# EAGLE board CT_schematic (EAGLE 7.6.0)

Size 100 x 80 mm. Coordinates in mm from the lower left corner, seen from the top.
Outline: 0,0 100,0 100,80 0,80 0,0
Copper layers (1*16): Top 0.035mm / dielectric 1.5mm / Bottom 0.035mm
Design rules "default": minimum track width 10mil, minimum drill 24mil, track to track 8mil, track to pad 8mil, pad to pad 8mil, via to via 8mil, smd to smd 8mil, copper to edge 40mil, drill to drill 8mil, minimum pad ring 10mil, minimum via ring 8mil, stop-mask expansion 4mil, vias tented up to drill 0mil, thermal gap 10mil

## Footprints (pad centres in the part's own frame; a part is rotated, then mirrored left to right if it is on the bottom)
C0603 = smd 0.8 x 0.8: 1 -0.762,0; 2 0.762,0
C0402 = smd 0.5 x 0.5: 1 -0.508,0; 2 0.508,0
C0805 = smd 1.2 x 1.3: 1 -1.016,0; 2 1.016,0
C1206 = smd 1.3 x 1.6: 1 -1.524,0; 2 1.524,0
C1210 = smd 1.2 x 2.5: 1 -1.524,0; 2 1.524,0
EXV-9H = smd 3.505 x 1.676: 1 -2.857,0; 2 2.857,0
PJ-037B_PACKAGE = drill 3.7 square: 1 12,0 | drill 3.2 square: 2 6,0
R0603 = smd 0.8 x 0.8: 1 -0.762,0; 2 0.762,0
WLCSP81 = smd 0.25 x 0.25: A1 -1.6,1.6; A2 -1.2,1.6; A3 -0.8,1.6; A4 -0.4,1.6; A5 0,1.6; A6 0.4,1.6; A7 0.8,1.6; A8 1.2,1.6; A9 1.6,1.6; B1 -1.6,1.2; B2 -1.2,1.2; B3 -0.8,1.2; B4 -0.4,1.2; B5 0,1.2; B6 0.4,1.2; B7 0.8,1.2; B8 1.2,1.2; B9 1.6,1.2; C1 -1.6,0.8; C2 -1.2,0.8; C3 -0.8,0.8; C4 -0.4,0.8; C5 0,0.8; C6 0.4,0.8; C7 0.8,0.8; C8 1.2,0.8; C9 1.6,0.8; D1 -1.6,0.4; D2 -1.2,0.4; D3 -0.8,0.4; D4 -0.4,0.4; D5 0,0.4; D6 0.4,0.4; D7 0.8,0.4; D8 1.2,0.4; D9 1.6,0.4; E1 -1.6,0; E2 -1.2,0; E3 -0.8,0; E4 -0.4,0; E5 0,0; E6 0.4,0; E7 0.8,0; E8 1.2,0; E9 1.6,0; F1 -1.6,-0.4; F2 -1.2,-0.4; F3 -0.8,-0.4; F4 -0.4,-0.4; F5 0,-0.4; F6 0.4,-0.4; F7 0.8,-0.4; F8 1.2,-0.4; F9 1.6,-0.4; G1 -1.6,-0.8; G2 -1.2,-0.8; G3 -0.8,-0.8; G4 -0.4,-0.8; G5 0,-0.8; G6 0.4,-0.8; G7 0.8,-0.8; G8 1.2,-0.8; G9 1.6,-0.8; H1 -1.6,-1.2; H2 -1.2,-1.2; H3 -0.8,-1.2; H4 -0.4,-1.2; H5 0,-1.2; H6 0.4,-1.2; H7 0.8,-1.2; H8 1.2,-1.2; H9 1.6,-1.2; J1 -1.6,-1.6; J2 -1.2,-1.6; J3 -0.8,-1.6; J4 -0.4,-1.6; J5 0,-1.6; J6 0.4,-1.6; J7 0.8,-1.6; J8 1.2,-1.6; J9 1.6,-1.6
TST-110-05-T-D-RA = drill 1 pad 1.7 square: 1 0,0 | drill 1 pad 1.7: 2 0,2.54; 3 2.54,0; 4 2.54,2.54; 5 5.08,0; 6 5.08,2.54; 7 7.62,0; 8 7.62,2.54; 9 10.16,0; 10 10.16,2.54; 11 12.7,0; 12 12.7,2.54; 13 15.24,0; 14 15.24,2.54; 15 17.78,0; 16 17.78,2.54; 17 20.32,0; 18 20.32,2.54; 19 22.86,0; 20 22.86,2.54
SOIC-8 = smd 1.6 x 0.6: 1 -2.7,1.905 | smd 1.55 x 0.6: 2 -2.7,0.635; 3 -2.7,-0.635; 4 -2.7,-1.905; 5 2.7,-1.905; 6 2.7,-0.635; 7 2.7,0.635; 8 2.7,1.905
182-009-MALE = drill 1.194 pad 1.524 octagon: 1 -5.537,10.923; 2 -2.769,10.923; 3 0,10.923; 4 2.769,10.923; 5 5.537,10.923; 6 -4.153,8.08; 7 -1.384,8.08; 8 1.384,8.08; 9 4.153,8.08 | hole 3.048: -12.446,9.501; 12.446,9.501
MOLEX_47219-2001 = smd 0.8 x 1.5: 1 3.2,-2.1; 2 2.1,-2.1; 3 1,-2.1; 4 -0.1,-2.1; 5 -1.2,-2.1; 6 -2.3,-2.1; 7 -3.4,-2.1; 8 -4.5,-2.1 | smd 1.5 x 2.05: G1 6.875,-4.7; G2 6.875,3.6; G3 -6.875,3.6; G4 -6.875,-4.7
QFN-32 = smd 0.6 x 0.3: 1 -2.3,1.75; 2 -2.3,1.25; 3 -2.3,0.75; 4 -2.3,0.25; 5 -2.3,-0.25; 6 -2.3,-0.75; 7 -2.3,-1.25; 8 -2.3,-1.75; 17 2.3,-1.75; 18 2.3,-1.25; 19 2.3,-0.75; 20 2.3,-0.25; 21 2.3,0.25; 22 2.3,0.75; 23 2.3,1.25; 24 2.3,1.75 | smd 0.3 x 0.6: 9 -1.75,-2.3; 10 -1.25,-2.3; 11 -0.75,-2.3; 12 -0.25,-2.3; 13 0.25,-2.3; 14 0.75,-2.3; 15 1.25,-2.3; 16 1.75,-2.3; 25 1.75,2.3; 26 1.25,2.3; 27 0.75,2.3; 28 0.25,2.3; 29 -0.25,2.3; 30 -0.75,2.3; 31 -1.25,2.3; 32 -1.75,2.3 | smd 3.2 x 3.2: EXP 0,0
SJ-43515TS-SMT-TR = smd 2.2 x 3: 1 0.6,-7.4; 4 3.4,-7.4 | smd 3 x 3: 2 12.8,-7.4; 5 17,-3 | smd 2 x 3: 3 5.3,0; 6 2.5,0 | drill 1.8: P$7 4.5,-3.69; P$8 11.54,-3.69
WM-64PC = drill 0.6 pad 1: 1 -1,0.95; 2 -1,-0.95
WFDN-8 = smd 0.48 x 0.7: 1 0,0; 2 1.27,0; 3 2.54,0; 4 3.81,0; 5 3.81,4.45; 6 2.54,4.45; 7 1.27,4.45; 8 0,4.45 | smd 4 x 3: 9 1.89,2.25
ASEK = smd 1.4 x 1: 1 -1.1,-0.8; 2 1.1,-0.8; 3 1.1,0.8; 4 -1.1,0.8
ASFL1 = smd 1.7 x 1.5: 1 -1.27,-1.1; 2 1.27,-1.1; 3 1.27,1.1; 4 -1.27,1.1
WSON-8 = smd 0.3 x 0.6: 1 -0.75,0; 2 0.05,0; 3 0.85,0; 4 1.65,0; 5 1.65,3.8; 6 0.85,3.8; 7 0.05,3.8; 8 -0.75,3.8 | smd 3 x 2.6: PAD 0.45,1.9
SON-6 = smd 0.55 x 0.3: 1 -0.355,0.5 | smd 0.52 x 0.3: 2 -0.37,0; 3 -0.37,-0.5; 4 0.37,-0.5; 5 0.37,0; 6 0.37,0.5
SW_4-1437565-2 = smd 1.4 x 2.1: 1 -2.23,4.55; 2 -2.23,-4.55; 3 2.23,4.55; 4 2.23,-4.55
LGM67K-G1J2-24-Z = smd 0.8 x 1.4: A -2,0; C 0,0
NC7SZ125M5X = smd 1.3 x 0.7: 1 -1.3,0.95; 2 -1.3,0; 3 -1.3,-0.95; 4 1.3,-0.95; 5 1.3,0.95

## Placement (x,y rotation side)
C1  1e-06  [C0603]  -33.02,92.71 0 top  (outside the outline)
C2  1e-07  [C0603]  -36.83,92.71 0 top  (outside the outline)
C3  1e-07  [C0603]  -40.64,92.71 0 top  (outside the outline)
C4  1e-07  [C0603]  -44.45,92.71 0 top  (outside the outline)
C5  1e-07  [C0603]  -48.26,92.71 0 top  (outside the outline)
C6  1e-07  [C0603]  -52.07,92.71 0 top  (outside the outline)
C7  4.7e-06  [C0603]  -29.21,92.71 0 top  (outside the outline)
C8  1e-07  [C0603]  -55.88,92.71 0 top  (outside the outline)
C9  1e-07  [C0603]  -59.69,92.71 0 top  (outside the outline)
C10  1e-07  [C0603]  -63.5,92.71 0 top  (outside the outline)
C11  1e-08  [C0603]  -67.31,92.71 0 top  (outside the outline)
C12  1e-06  [C0603]  -71.12,92.71 0 top  (outside the outline)
C13  1e-07  [C0402]  -80.01,97.79 0 top  (outside the outline)
C14  1e-08  [C0402]  -83.82,97.79 0 top  (outside the outline)
C15  1e-06  [C0603]  -74.93,92.71 0 top  (outside the outline)
C16  1e-06  [C0603]  -78.74,92.71 0 top  (outside the outline)
C17  1e-07  [C0402]  -87.63,97.79 0 top  (outside the outline)
C18  1e-05  [C0805]  -66.04,80.01 0 top  (outside the outline)
C19  1e-06  [C0603]  -82.55,92.71 0 top  (outside the outline)
C20  1e-06  [C0603]  -86.36,92.71 0 top  (outside the outline)
C21  1e-06  [C0603]  -90.17,92.71 0 top  (outside the outline)
C22  1e-06  [C0603]  -93.98,92.71 0 top  (outside the outline)
C23  1e-06  [C0603]  -15.24,97.79 0 top  (outside the outline)
C24  1e-06  [C0603]  -19.05,97.79 0 top  (outside the outline)
C25  1e-06  [C0603]  -22.86,97.79 0 top  (outside the outline)
C26  1e-07  [C0402]  -91.44,97.79 0 top  (outside the outline)
C27  1e-07  [C0402]  -95.25,97.79 0 top  (outside the outline)
C28  1e-07  [C0402]  -15.24,102.87 0 top  (outside the outline)
C29  1e-07  [C0402]  -19.05,102.87 0 top  (outside the outline)
C30  1e-06  [C0603]  -26.67,97.79 0 top  (outside the outline)
C31  1e-07  [C0402]  -22.86,102.87 0 top  (outside the outline)
C32  1e-08  [C0402]  -26.67,102.87 0 top  (outside the outline)
C33  1e-08  [C0402]  -30.48,102.87 0 top  (outside the outline)
C34  1e-08  [C0402]  -34.29,102.87 0 top  (outside the outline)
C35  1e-08  [C0402]  -38.1,102.87 0 top  (outside the outline)
C36  1e-05  [C1206]  -41.91,80.01 0 top  (outside the outline)
C37  1e-05  [C0805]  -71.12,80.01 0 top  (outside the outline)
C38  1e-08  [C0402]  -41.91,102.87 0 top  (outside the outline)
C39  1e-05  [C1206]  -48.26,80.01 0 top  (outside the outline)
C40  1e-05  [C1210]  -29.21,81.28 0 top  (outside the outline)
C41  1e-06  [C0603]  -30.48,97.79 0 top  (outside the outline)
C42  1e-05  [C1210]  -35.56,81.28 0 top  (outside the outline)
C43  1e-07  [C0402]  -45.72,102.87 0 top  (outside the outline)
C44  0.0001  [EXV-9H]  -74.93,73.66 0 top  (outside the outline)
C45  0.0001  [EXV-9H]  -86.36,73.66 0 top  (outside the outline)
C46  1e-08  [C0402]  -49.53,102.87 0 top  (outside the outline)
C47  1e-08  [C0402]  -53.34,102.87 0 top  (outside the outline)
J1  PJ-037B  [PJ-037B_PACKAGE]  -27.94,43.18 0 top  (outside the outline)
R2  1000.0  [R0603]  -34.29,97.79 0 top  (outside the outline)
R4  4700.0  [R0603]  -38.1,97.79 0 top  (outside the outline)
R5  2200.0  [R0603]  -41.91,97.79 0 top  (outside the outline)
R6  2200.0  [R0603]  -45.72,97.79 0 top  (outside the outline)
R7  10000.0  [R0603]  -76.2,87.63 0 top  (outside the outline)
R8  10000.0  [R0603]  -81.28,87.63 0 top  (outside the outline)
R9  10000.0  [R0603]  -86.36,87.63 0 top  (outside the outline)
R10  10000.0  [R0603]  -91.44,87.63 0 top  (outside the outline)
R11  10000.0  [R0603]  -15.24,92.71 0 top  (outside the outline)
R12  120.0  [R0603]  -49.53,97.79 0 top  (outside the outline)
R13  100000.0  [R0603]  -76.2,80.01 0 top  (outside the outline)
R14  100000.0  [R0603]  -81.28,80.01 0 top  (outside the outline)
R15  100000.0  [R0603]  -86.36,80.01 0 top  (outside the outline)
R16  100000.0  [R0603]  -91.44,80.01 0 top  (outside the outline)
R17  100000.0  [R0603]  -15.24,87.63 0 top  (outside the outline)
R18  100000.0  [R0603]  -20.32,87.63 0 top  (outside the outline)
R19  1270.0  [R0603]  -53.34,97.79 0 top  (outside the outline)
R20  1270.0  [R0603]  -57.15,97.79 0 top  (outside the outline)
R21  100000.0  [R0603]  -25.4,87.63 0 top  (outside the outline)
R22  100000.0  [R0603]  -30.48,87.63 0 top  (outside the outline)
R23  100000.0  [R0603]  -35.56,87.63 0 top  (outside the outline)
R24  100000.0  [R0603]  -40.64,87.63 0 top  (outside the outline)
R25  200.0  [R0603]  -60.96,97.79 0 top  (outside the outline)
R26  1000.0  [R0603]  -64.77,97.79 0 top  (outside the outline)
R27  100000.0  [R0603]  -45.72,87.63 0 top  (outside the outline)
R28  2231.0  [R0603]  -68.58,97.79 0 top  (outside the outline)
R29  1000.0  [R0603]  -72.39,97.79 0 top  (outside the outline)
R30  100000.0  [R0603]  -50.8,87.63 0 top  (outside the outline)
R31  300000.0  [R0603]  -55.88,87.63 0 top  (outside the outline)
R32  100000.0  [R0603]  -60.96,87.63 0 top  (outside the outline)
R33  10000.0  [R0603]  -20.32,92.71 0 top  (outside the outline)
R34  10000.0  [R0603]  -25.4,92.71 0 top  (outside the outline)
R35  9100.0  [R0603]  -76.2,97.79 0 top  (outside the outline)
R36  680000.0  [R0603]  -66.04,87.63 0 top  (outside the outline)
R37  120000.0  [R0603]  -71.12,87.63 0 top  (outside the outline)
U1  STM32L476MGY6  [WLCSP81]  -80.01,64.77 0 top  (outside the outline)
U2  TST-110-05-T-D-RA  [TST-110-05-T-D-RA]  -46.99,71.12 0 top  (outside the outline)
U3  24AA1025T-I/SN  [SOIC-8]  -22.86,54.61 0 top  (outside the outline)
U4  MCP2562-E/SN  [SOIC-8]  -36.83,54.61 0 top  (outside the outline)
U5  182-009-113R531  [182-009-MALE]  -36.83,6.35 0 top  (outside the outline)
U6  0472192001  [MOLEX_47219-2001]  -62.23,8.89 0 top  (outside the outline)
U7  SGTL5000XNAA3  [QFN-32]  -90.17,41.91 0 top  (outside the outline)
U8  SJ-43515TS-SMT-TR  [SJ-43515TS-SMT-TR]  -39.37,31.75 0 top  (outside the outline)
U9  SJ-43515TS-SMT-TR  [SJ-43515TS-SMT-TR]  -67.31,31.75 0 top  (outside the outline)
U10  SJ-43515TS-SMT-TR  [SJ-43515TS-SMT-TR]  -95.25,31.75 0 top  (outside the outline)
U11  WM-64PCT  [WM-64PC]  -76.2,41.91 0 top  (outside the outline)
U12  SST26VF032B-104I/MF  [WFDN-8]  -67.31,39.37 0 top  (outside the outline)
U13  ASEK-32.768KHz-ECST  [ASEK]  -66.04,73.66 0 top  (outside the outline)
U14  ASFL-24.57MHZ-NCS  [ASFL1]  -46.99,64.77 0 top  (outside the outline)
U15  ASFL1-25MHZ-NCS  [ASFL1]  -63.5,64.77 0 top  (outside the outline)
U16  LP3878SDX-ADJ/NOPB  [WSON-8]  -58.42,53.34 0 top  (outside the outline)
U17  LP3878SDX-ADJ/NOPB  [WSON-8]  -78.74,53.34 0 top  (outside the outline)
U18  LP2951ACSDX/NOPB  [WSON-8]  -29.21,62.23 0 top  (outside the outline)
U19  TPS3895ADRYR  [SON-6]  -55.88,101.6 0 top  (outside the outline)
U20  4-1437565-2  [SW_4-1437565-2]  -44.45,43.18 0 top  (outside the outline)
U21  Q65110A2395  [LGM67K-G1J2-24-Z]  -17.78,81.28 0 top  (outside the outline)
U22  nc7sz125m5x  [NC7SZ125M5X]  -53.34,80.01 0 top  (outside the outline)
U23  nc7sz125m5x  [NC7SZ125M5X]  -59.69,80.01 0 top  (outside the outline)

## Library data of the parts
C1-C47 J1 R2 R4-R37 U1-U23 = circuit_tree

## Nets
CLK_U1_C9: U1.C9 U13.3
CLK_U1_D9: U1.D9 U15.3
CLK_U7_21: U7.21 U14.3
GND: C1.2 C2.2 C3.2 C4.2 C5.2 C6.2 C7.2 C8.2 C9.2 C10.2 C11.2 C12.2 C13.2 C14.2 C15.2 C16.2 C17.2 C18.2 C26.2 C27.2 C28.2 C29.2 C30.2 C31.2 C32.2 C33.2 C34.2 C35.2 C36.2 C37.2 C38.2 C39.2 C40.2 C41.2 C42.2 C43.2 C44.2 C45.2 C46.2 C47.2 J1.2 R2.2 R7.2 R20.2 R26.2 R29.2 R32.2 R35.2 R37.2 U1.A8 U1.B1 U1.G9 U1.J2 U1.J9 U2.4 U2.6 U2.8 U2.10 U2.12 U2.14 U2.16 U2.18 U2.20 U3.4 U3.7 U4.2 U4.8 U5.5 U6.6 U6.G1 U6.G2 U6.G3 U6.G4 U7.1 U7.3 U7.7 U7.EXP U9.1 U10.1 U11.2 U12.4 U12.9 U13.2 U14.2 U15.2 U16.3 U16.PAD U17.3 U17.PAD U18.3 U18.4 U18.PAD U19.2 U21.C U22.2 U22.3 U23.1 U23.3
NET_U1_A5: R5.1 U1.A5 U3.6
NET_U1_A7: R6.1 U1.A7 U3.5
NET_U1_D7: R7.1 U1.D7
NET_U1_E9: R4.1 U1.E9 U23.4
NET_U1_J6: U21.A
NET_U1_J7: U20.3 U20.4
NET_U3_1: R10.1 U3.1
NET_U3_2: R11.1 U3.2
NET_U3_3: R9.1 U3.3
NET_U4_6: R12.2 U4.6
NET_U5_2: R12.2 U4.6 U5.2
NET_U5_3: R12.1 U4.7 U5.3
NET_U7_10: C29.1 U7.10
NET_U7_29: R19.1 U7.29
NET_U7_31: R20.1 U7.31
NET_U8_1: U7.4 U8.1
NET_U8_2: U7.2 U8.2
NET_U8_5: U7.6 U8.5
NET_U9_2: C20.1 U9.2
NET_U9_5: C19.1 U9.5
NET_U9_11: C20.2
NET_U9_12: C19.2
NET_U10_2: C22.1 C23.1 U10.2
NET_U10_5: C21.1 U10.5
NET_U10_13: C22.2 C23.2
NET_U10_14: C21.2
NET_U11_1: C24.1 C25.1 C30.1 U7.16 U11.1
NET_U11_15: C24.2 C25.2
NET_U16_1: C35.1 U16.1
NET_U16_6: R25.2 R26.1 U16.6
NET_U16_8: R24.1 U16.8
NET_U17_1: C38.1 U17.1
NET_U17_6: R28.2 R29.1 U17.6
NET_U17_8: R27.1 U17.8
NET_U18_5: R30.1 U18.5
NET_U18_7: R31.2 R32.1 U18.7
NET_U19_1: R34.1 R35.1 U19.1
NET_U19_3: R36.2 R37.1 U19.3
NET_U19_4: R33.1 U19.4 U22.4 U23.2
NET_U20_1: R2.1 U20.1 U20.2
PROC_CAN1_RX: U1.D1 U4.4
PROC_CAN1_TX: U1.C1 U4.1
PROC_QUADSPI_BK1_IO0: U1.J4 U12.5
PROC_QUADSPI_BK1_IO1: U1.J5 U12.2
PROC_QUADSPI_BK1_IO2: R22.1 U1.H4 U12.3
PROC_QUADSPI_BK1_IO3: R23.1 U1.H5 U12.7
PROC_QUADSPI_CLK: U1.H3 U12.6
PROC_QUADSPI_NCS: R21.1 U1.G3 U12.1
PROC_SAI1_FS_B: U1.B7 U7.23
PROC_SAI1_SCK_B: U1.F6 U7.24
PROC_SAI1_SD_B: U1.C7 U7.26
PROC_SDMMC1_CK: R14.1 U1.B3 U6.5
PROC_SDMMC1_CMD: R13.1 U1.A3 U6.3
PROC_SDMMC1_D0: R15.1 U1.F2 U6.7
PROC_SDMMC1_D1: R16.1 U1.E1 U6.8
PROC_SDMMC1_D2: R17.1 U1.D3 U6.1
PROC_SDMMC1_D3: R18.1 U1.C3 U6.2
PROC_SYS_JTCK_SWCLK: U1.B2 U2.9
PROC_SYS_JTDO_SWO: U1.A6 U2.13
PROC_SYS_JTMS_SWDIO: U1.C2 U2.7
RST_OUT_U2_SRESET_B: R8.1 U2.15 U22.1
VCC_S1_6V5: C36.1 C39.1 C41.1 C44.1 C45.1 J1.1 R24.2 R27.2 U16.4 U17.4 U18.8
VCC_TIER1_1V2: C26.1 C37.1 R25.1 U7.30 U16.5
VCC_TIER1_3V3: C1.1 C2.1 C3.1 C4.1 C5.1 C6.1 C7.1 C8.1 C9.1 C10.1 C11.1 C12.1 C13.1 C14.1 C16.1 C17.1 C18.1 C27.1 C28.1 C31.1 C32.1 C33.1 C34.1 C40.1 C43.1 C46.1 C47.1 R4.2 R5.2 R6.2 R8.2 R9.2 R10.2 R11.2 R13.2 R14.2 R15.2 R16.2 R17.2 R18.2 R19.2 R21.2 R22.2 R23.2 R28.1 R33.2 R34.2 R36.1 U1.A1 U1.A9 U1.B6 U1.B9 U1.E4 U1.G8 U1.H9 U1.J1 U1.J8 U2.1 U3.8 U4.5 U6.4 U7.5 U7.20 U12.8 U13.4 U14.4 U15.4 U17.5 U19.6 U22.5 U23.5
VCC_TIER1_5V0: C15.1 C42.1 R30.2 R31.1 U4.3 U18.1

## Tracks (layer width: path | path; a pad name or v marks a point on that pad's centre or on a via)
CLK_U1_C9  (1 unrouted)
CLK_U1_D9  (1 unrouted)
CLK_U7_21  (1 unrouted)
GND  (97 unrouted)
NET_U1_A5  (2 unrouted)
NET_U1_A7  (2 unrouted)
NET_U1_D7  (1 unrouted)
NET_U1_E9  (2 unrouted)
NET_U1_J7  (1 unrouted)
NET_U3_1  (1 unrouted)
NET_U3_2  (1 unrouted)
NET_U3_3  (1 unrouted)
NET_U4_6  (1 unrouted)
NET_U5_2  (2 unrouted)
NET_U5_3  (2 unrouted)
NET_U7_10  (1 unrouted)
NET_U7_29  (1 unrouted)
NET_U7_31  (1 unrouted)
NET_U8_1  (1 unrouted)
NET_U8_2  (1 unrouted)
NET_U8_5  (1 unrouted)
NET_U9_2  (1 unrouted)
NET_U9_5  (1 unrouted)
NET_U10_2  (2 unrouted)
NET_U10_5  (1 unrouted)
NET_U10_13  (1 unrouted)
NET_U11_1  (4 unrouted)
NET_U11_15  (1 unrouted)
NET_U16_1  (1 unrouted)
NET_U16_6  (2 unrouted)
NET_U16_8  (1 unrouted)
NET_U17_1  (1 unrouted)
NET_U17_6  (2 unrouted)
NET_U17_8  (1 unrouted)
NET_U18_5  (1 unrouted)
NET_U18_7  (2 unrouted)
NET_U19_1  (2 unrouted)
NET_U19_3  (2 unrouted)
NET_U19_4  (3 unrouted)
NET_U20_1  (2 unrouted)
PROC_CAN1_RX  (1 unrouted)
PROC_CAN1_TX  (1 unrouted)
PROC_QUADSPI_BK1_IO0  (1 unrouted)
PROC_QUADSPI_BK1_IO1  (1 unrouted)
PROC_QUADSPI_BK1_IO2  (2 unrouted)
PROC_QUADSPI_BK1_IO3  (2 unrouted)
PROC_QUADSPI_CLK  (1 unrouted)
PROC_QUADSPI_NCS  (2 unrouted)
PROC_SAI1_FS_B  (1 unrouted)
PROC_SAI1_SCK_B  (1 unrouted)
PROC_SAI1_SD_B  (1 unrouted)
PROC_SDMMC1_CK  (2 unrouted)
PROC_SDMMC1_CMD  (2 unrouted)
PROC_SDMMC1_D0  (2 unrouted)
PROC_SDMMC1_D1  (2 unrouted)
PROC_SDMMC1_D2  (2 unrouted)
PROC_SDMMC1_D3  (2 unrouted)
PROC_SYS_JTCK_SWCLK  (1 unrouted)
PROC_SYS_JTDO_SWO  (1 unrouted)
PROC_SYS_JTMS_SWDIO  (1 unrouted)
RST_OUT_U2_SRESET_B  (2 unrouted)
VCC_S1_6V5  (10 unrouted)
VCC_TIER1_1V2  (4 unrouted)
VCC_TIER1_3V3  (70 unrouted)
VCC_TIER1_5V0  (5 unrouted)